# Altium PCB bottom.PcbDoc
Units mil, origin at the board's own origin, x right, y up, seen from the top; angles counter-clockwise.
Board outline 4222.01 x 2922.03 mil, 2 copper layers (Top Layer, Bottom Layer); 17 components, 14 nets, 128 pads, 40 vias.
Unrouted connection lines stored in the file: 21.
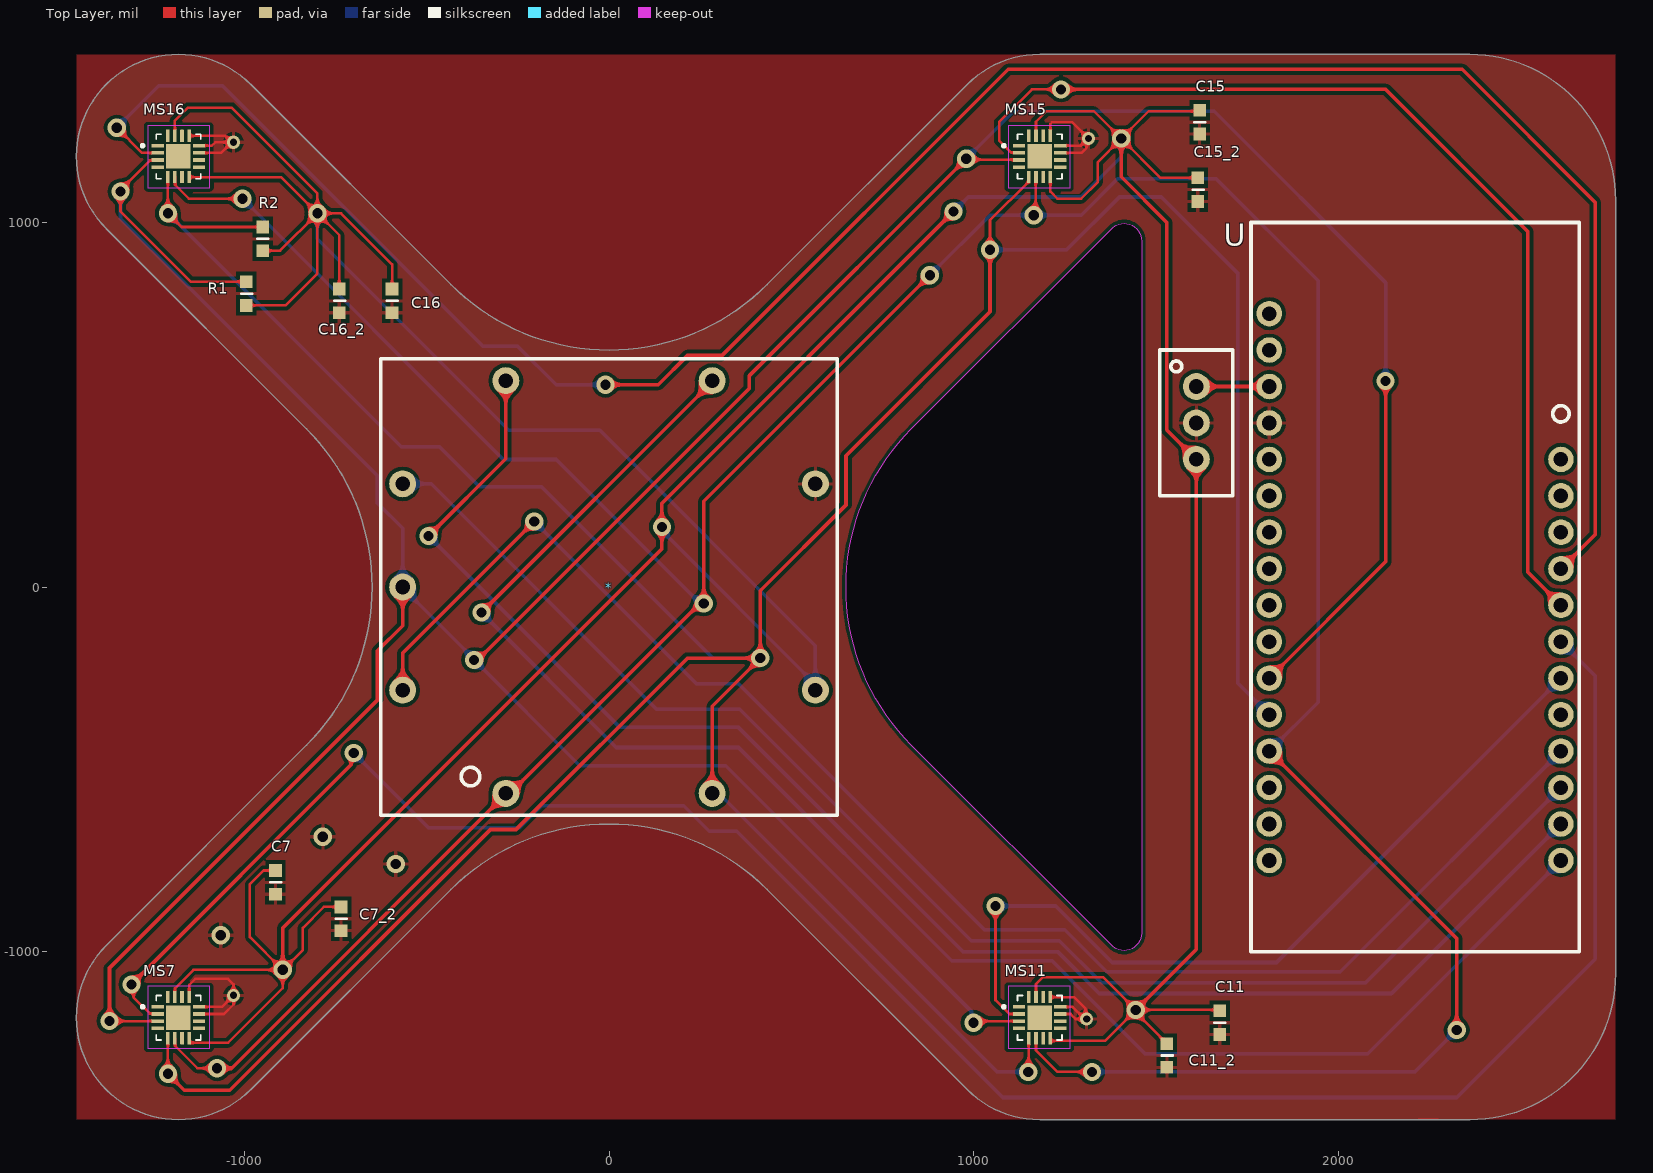
[diagram p0: Top Layer view]
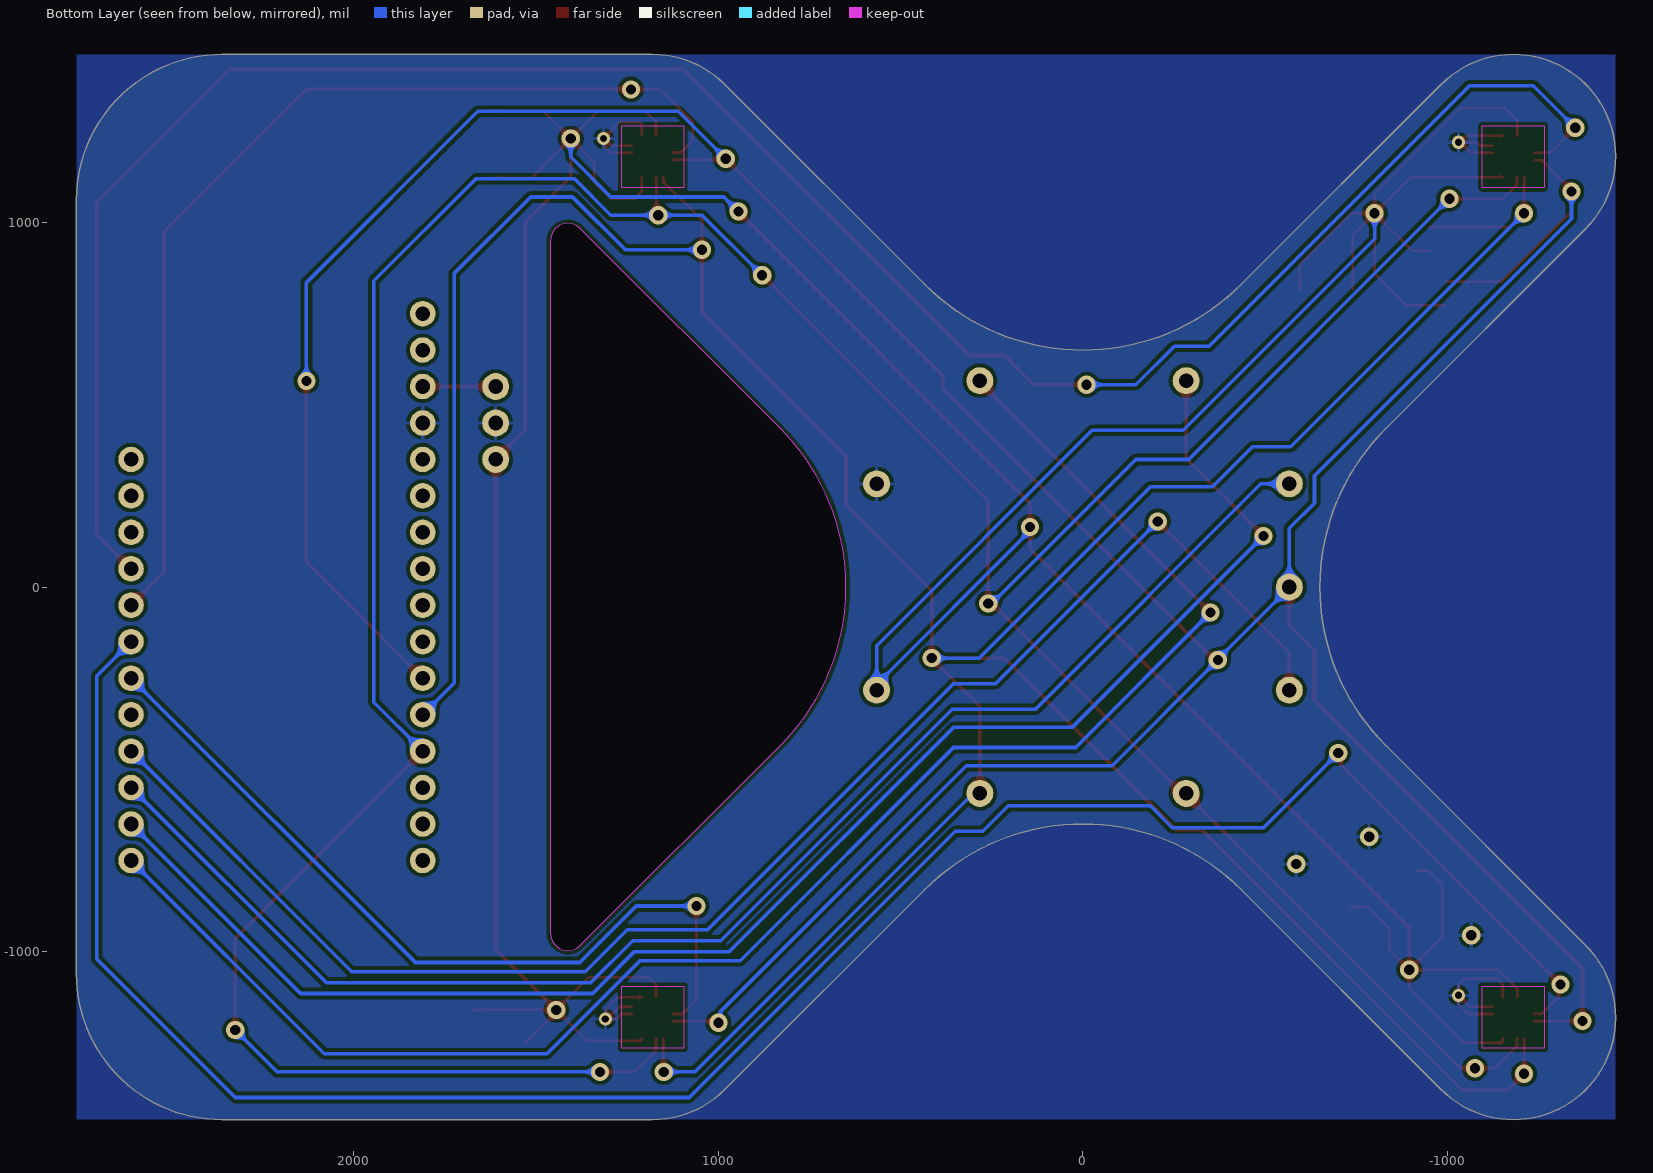
[diagram p1: Bottom Layer view, seen from below]
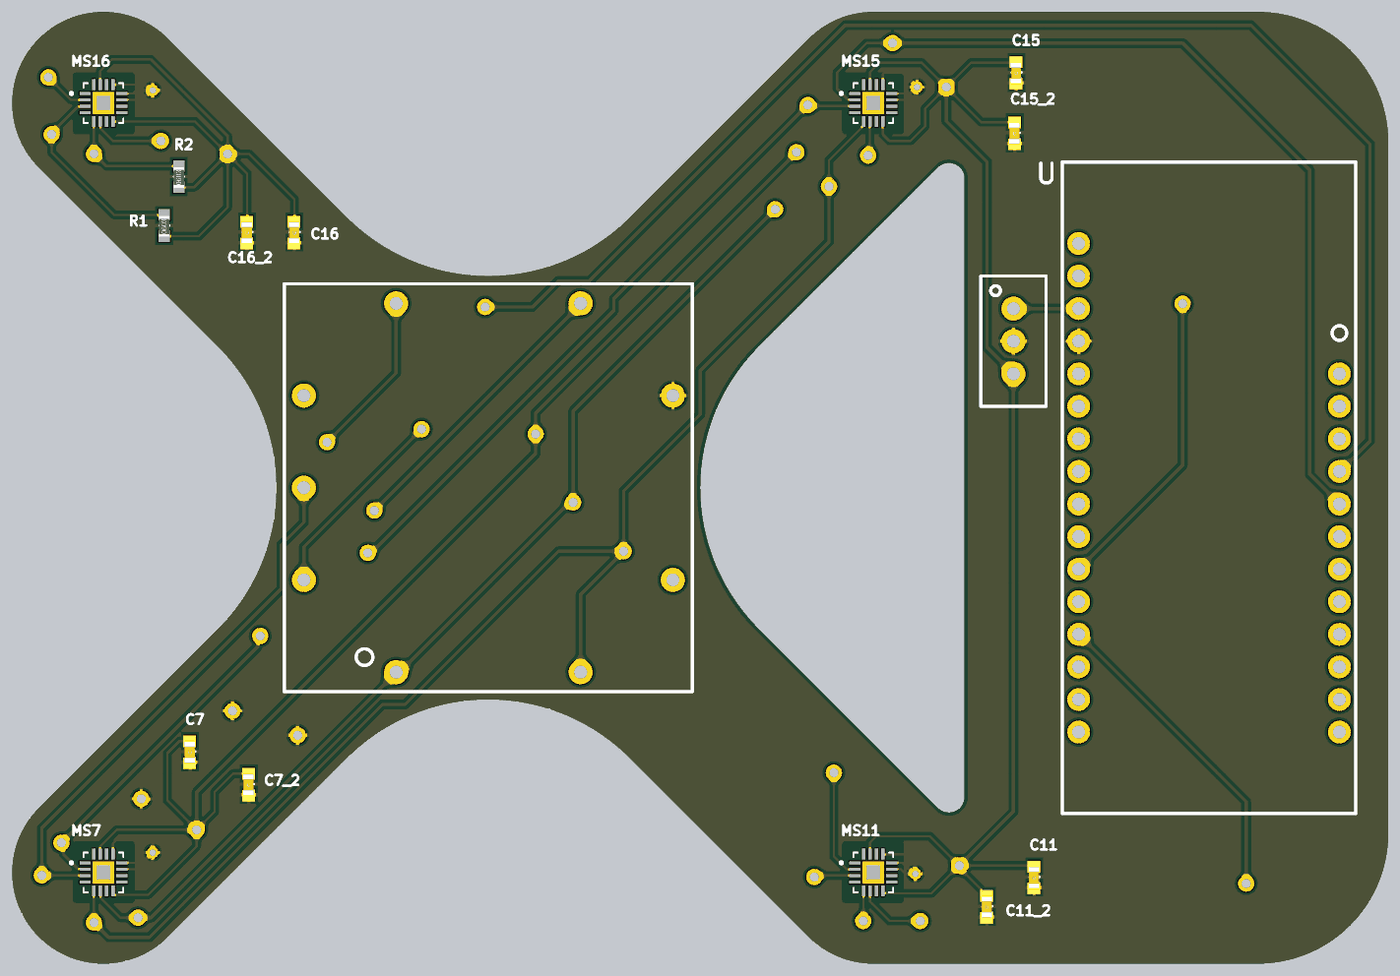
[diagram p2: 3D render of the assembled board from above, using the file's embedded part models]

## Layer stack, top to bottom
Top Solder: solder mask 0.4, Solder Resist, Dk 3.5
Top Layer: signal copper 1.4
Dielectric 1: dielectric 12.6, FR-4, Dk 4.8
Bottom Layer: signal copper 1.4
Bottom Solder: solder mask 0.4, Solder Resist, Dk 3.5

## Board outline
-983,-1379 cw(c-1181,-1181) -1379,-983 -829.61,-433.61 ccw(c-1263.21,0) -829.61,433.61 -1379,983 cw(c-1181,1181) -983,1379 -433.61,829.61 ccw(c0,1263.21) 433.61,829.61 983,1379 cw(c1181,1181) 1181,1461.01 2361,1461.01 cw(c2361,1061.01) 2761,1061.01 2761,-1061 cw(c2361,-1061) 2361,-1461 2360.99,-1461.01 1181,-1461.01 cw(c1181,-1181) 983,-1379 433.61,-829.61 ccw(c0,-1263.21) -433.61,-829.61
cut-out: 1379.06,-983.06 829.61,-433.61 cw(c1263.21,0) 829.61,433.61 829.61,433.91 1378.91,983.22 cw(c1412.88,949.12) 1461.01,949.12 1460.8,948.9 1460.8,-949.12 cw(c1412.88,-949.12)

## Design rules (kind name [scope] priority, off if disabled: settings)
Clearance [All] p1: gap=10 ignorepadtopadclearanceinfootprint=FALSE except(0: Arc-Hole Track-Hole SMDPad-Hole THPad-Hole Via-Hole Fill-Hole Poly-Hole Region-Hole Text-Hole)
PolygonConnect [All] p1: connectstyle=Relief reliefconductorwidth=10 reliefentries=4 polygonreliefangle="90 Angle" airgapwidth=10
RoutingVias [All] p1: holewidth=28 width=50 viastyle="Through Hole" minholewidth=28 minwidth=50 maxholewidth=28 maxwidth=50
SolderMaskExpansion [All] p1: expansion=4 istentingtop=FALSE
Width [All] p1: maxlimit=10 minlimit=7 preferedwidth=10 toplayer_maxwidth=7 toplayer_prefwidth=7 bottomlayer_minwidth=10 minimp=50.000000 maximp=50.000000 favimp=50.000000
30 further rules are at their usual default settings.

## Classes and differential pairs
component class MAGNETO: C7 C7_2 C11 C11_2 C15 C15_2 C16 C16_2 MS7 MS11 MS15 MS16 R1 R2

## Components (designator, comment, footprint, x,y, rotation, side; value= is the part's Value field where it differs from the comment)
* "PIN9_small" PIN9_small 0,0 r0 top
C7 "0.1uF" CAP_0603 -915,-810 r90 top
C7_2 "0.1uF" CAP_0603 -735,-910 r90 top
C11 "0.1uF" CAP_0603 1675,-1195 r90 top
C11_2 "0.1uF" CAP_0603 1530,-1285 r90 top
C15 "0.1uF" CAP_0603 1620,1275 r90 top
C15_2 "0.1uF" CAP_0603 1615,1090 r90 top
C16 "0.1uF" CAP_0603 -595,785 r90 top
C16_2 "0.1uF" CAP_0603 -740,785 r90 top
MS7 "MLX90393" MLX90393 -1181,-1181 r0 top
MS11 "MLX90393" MLX90393 1181,-1181 r0 top
MS15 "MLX90393" MLX90393 1181,1181 r0 top
MS16 "MLX90393" MLX90393 -1181,1181 r0 top
R1 "10k" RES_0603 -995,805 r90 top
R2 "10k" RES_0603 -950,955 r90 top
U "52832" feather 2211,0 r0 top
? "REGULATOR" "linear regulator" 1611,450 r0 top

## Footprints (in the part's own frame and the unit in brackets; to place one, negate y for a bottom-side part, rotate by r counter-clockwise, add the part's x,y. Pads: shape width x height; smd on the part's side, far side on the other; paste and mask are expansions set on the pad)
CAP_0603 [mil]
  rect 35x35 smd: 1(-32.5,0) 2(32.5,0)
  silkscreen extent 0,-16 0,14, body extent -53,-18 49,21, height 35
feather [mil]
  round 70 hole 40: 1(400,350) 2(400,250) 3(400,150) 4(400,50) 5(400,-50) 6(400,-150) 7(400,-250) 8(400,-350) 9(400,-450) 10(400,-550) 11(400,-650) 12(400,-750) 13(-400,750) 14(-400,650) 15(-400,550) 16(-400,450) 17(-400,350) 18(-400,250) 19(-400,150) 20(-400,50) 21(-400,-50) 22(-400,-150) 23(-400,-250) 24(-400,-350) 25(-400,-450) 26(-400,-550) 27(-400,-650) 28(-400,-750)
  silkscreen extent -450,-1000 450,1000
"linear regulator" [mil]
  round 74 hole 40: 1(0,100) 2(0,0) 3(0,-100)
  silkscreen extent -100,-200 100,200
MLX90393 [mm]
  rrect25% 0.86x0.26 smd: 1(-1.435,0.75) 2(-1.435,0.25) 3(-1.435,-0.25) 4(-1.435,-0.75) 9(1.435,-0.75) 10(1.435,-0.25) 11(1.435,0.25) 12(1.435,0.75)
  rrect25% 0.26x0.86 smd: 5(-0.75,-1.435) 6(-0.25,-1.435) 7(0.25,-1.435) 8(0.75,-1.435) 13(0.75,1.435) 14(0.25,1.435) 15(-0.25,1.435) 16(-0.75,1.435)
  rect 1.71x1.71 smd paste-2: 17(0,0)
  silkscreen extent -2.59,-1.55 1.55,1.55
PIN9_small [mil]
  round 74 hole 40: 1(-283,-566) 2(283,-566) 3(566,-283) 4(566,283) 5(283,566) 6(-283,566) 7(-566,283) 8(-566,0) 9(-566,-283)
  silkscreen extent -626,-626 626,626
RES_0603 [mil]
  rect 35x35 smd: 1(-32.5,0) 2(32.5,0)
  silkscreen extent 0,-16 0,14, body extent -34,-16 29,16, height 18

## Part data
C7 C7_2 C11 C11_2 C15 C15_2 C16 C16_2: library part CAP, "capacitance"
MS7 MS11 MS15 MS16: "sensor"
R1 R2: library part RES, "resistance"
U: library part Feather, "IC"
?: "linear regulator"

## Via types
v1: diameter 50, hole 28, Top Layer to Bottom Layer, 36 vias
v2: diameter 36, hole 20, Top Layer to Bottom Layer, 4 vias

## Nets (pads, with @x,y where several pads share a name; then routed paths per layer and width w, separated by ;. In a path a pad name is that pad's centre, name@x,y a point inside that pad or via, vN(x,y) a via of type N, cw(c..) or ccw(c..) an arc to the next point about the centre after c; other vN are vias at no path point)
GND: *.4 ?.2 C7.1 C7_2.1 C11.1 C11_2.1 C15.1 C15_2.1 C16.1 C16_2.1 MS7.11 MS7.12 MS7.13 MS11.11 MS11.12 MS11.13 MS15.11 MS15.12 MS15.13 MS16.11 MS16.12 MS16.13 U.16 | length 1407.1
  Top Layer w7: MS7.13 -1151.47,-1091.47 -1135,-1075 -1045,-1075 -1030,-1090 v2(-1030,-1120) ; MS16.13 -1052.81,1237.5 v2@-1035.31,1220 ; MS7.11 -1056.16,-1171.16 -1029.4,-1144.4 -1029.4,-1120.6 v2(-1030,-1120) ; MS7.12 -1061.47,-1151.47 v2(-1030,-1120) ; MS16.11 -1064.16,1190.84 v2@-1035,1220 ; MS16.12 -1089.47,1210.53 -1080,1220 v2@-1035.31,1220 ; v2(-1030,1220) v2@-1035,1220 ; MS11.13 1211.02,-1125 1275,-1125 1306.5,-1156.5 1306.5,-1181.5 v2(1310,-1185) v2@1305,-1185 ; MS15.13 1210.53,1270.53 1215,1275 1270,1275 v2(1315,1230) ; MS11.11 1266.16,-1171.16 1280,-1185 v2@1305,-1185 ; MS11.12 1271.47,-1151.47 v2@1305,-1185 ; MS15.11 1295.84,1190.84 1309.45,1204.45 1309.45,1224.45 v2(1315,1230) ; MS15.12 1294.17,1210.53 1313.64,1230 v2(1315,1230) ; v2@-1035.31,1220 v2@-1035,1220
  other v1: -1065,-955 -585,-760 -785,-685
Net*_1: *.1 MS7.6 MS11.6 MS15.6 MS16.6 U.25 | length 10111.4
  Top Layer w7: MS7.6 -1189.78,-1238.56 -1189.78,-1259.27 -1129.04,-1320 v1(-1075,-1320) ; MS16.6 -1189.78,1123.44 -1189.78,1102.73 -1152.04,1065 v1(-1005,1065) ; v1(1165,1020) 1170.09,1025.09 1170.09,1123.44 MS15.6 ; MS11.6 1171.16,-1271.16 1230,-1330 v1(1325,-1330)
  Top Layer w10: v1(-1075,-1320) -1035,-1320 -283,-568 *.1 -271.82,-566 249.18,-45 v1(260,-45) 260,235 v1(880,855) ; U.25 2325,-964 v1(2325,-1215)
  Bottom Layer w10: v1(-1005,1065) -290,350 -145,350 250,-45 v1(260,-45) ; v1(880,855) 1045,1020 v1(1165,1020) 1295,1020 1395,1120 1665,1120 1945,840 1945,-316 U.25 ; v1(1325,-1330) 2210,-1330 v1(2325,-1215)
Net*_2: *.2 MS7.5 MS11.5 MS15.5 MS16.5 R2.2 U.24 | length 10137.3
  Top Layer w7: MS7.5 -1210.26,-1237.76 -1210.26,-1334.74 v1(-1210,-1335) ; MS16.5 -1210.26,1124.24 -1210.26,1025.26 v1(-1210,1025) -1172.5,987.5 R2.2 ; v1(1045,925) 1045,1006.22 1151.47,1112.69 MS15.5 ; v1(1150,-1330) 1150.74,-1329.26 1150.74,-1238.23 MS11.5
  Top Layer w10: v1(-1210,-1335) -1165,-1380 -1040,-1380 -325,-665 -255,-665 215,-195 v1(415,-195) ; *.2 283,-327 v1(415,-195) ; v1(1045,925) 1045,755 650,360 650,225 415,-10 v1(415,-195)
  Bottom Layer w10: v1(-1210,1025) -570,385 -465,385 -355,275 -185,275 285,-195 v1(415,-195) ; *.2 300.32,-566 318.09,-583.77 318.77,-583.77 1065,-1330 v1(1150,-1330) ; v1(1045,925) 1255,925 1400,1070 1515,1070 1725,860 1725,-264 U.24
Net*_3: *.3 ?.3 C7.2 C7_2.2 C11.2 C11_2.2 C15.2 C15_2.2 C16.2 C16_2.2 MS7.8 MS7.15 MS11.8 MS11.15 MS15.8 MS15.15 MS16.8 MS16.15 R1.1 R2.1 | length 14223.7
  Top Layer w7: MS7.15 -1190.84,-1100.84 -1140,-1050 v1(-895,-1050) ; MS16.15 -1190.84,1279.16 -1155,1315 -1035,1315 -800,1080 v1(-800,1025) ; MS7.8 -1151.47,-1248.38 -1149.85,-1250 -1045,-1250 -895,-1100 v1(-895,-1050) ; MS16.8 -899.5,1124.5 v1(-800,1025) ; R1.1 -887.5,772.5 -800,860 v1(-800,1025) ; R2.1 -902.5,922.5 v1(-800,1025) ; C7.2 -947.5,-777.5 -985,-815 -985,-960 v1(-895,-1050) ; C16_2.2 -740,965 v1(-800,1025) ; C7_2.2 -782.5,-877.5 -840,-935 -840,-995 v1(-895,-1050) ; C16.2 -595,885 -735,1025 v1(-800,1025) ; MS11.15 1171.16,-1088.84 1190,-1070 1355,-1070 v1(1445,-1160) ; MS15.15 1171.16,1276.16 1200,1305 1330,1305 v1(1405,1230) ; MS11.8 1210.53,-1243.38 1212.15,-1245 1360,-1245 v1(1445,-1160) ; MS15.8 1210.53,1084.47 1230,1065 1295,1065 1340,1110 1340,1165 v1(1405,1230) ; C11_2.2 1445,-1167.5 v1(1445,-1160) ; C15_2.2 1512.5,1122.5 v1(1405,1230) ; C15.2 1617.5,1305 1480,1305 v1(1405,1230) ; C11.2 1672.5,-1160 v1(1445,-1160)
  Top Layer w10: v1(-895,-1050) -895,-935 145,105 v1(145,165) 145,230 v1(945,1030) ; v1(1405,1230) 1405,1125 1530,1000 1530,431 ?.3 1611,-994 v1(1445,-1160)
  Bottom Layer w10: v1(-800,1025) -800,955 -275,430 -25,430 566,-161 *.3@566,-266.82 ; v1(145,165) 145,154.18 *.3@566,-266.82 ; *.3 *.3@566,-266.82 ; v1(945,1030) 985,1070 1295,1070 1405,1180 v1(1405,1230)
Net*_5: *.5 U.12 | length 4579.9
  Top Layer w10: v1(-350,-70) 283,563 *.5
  Bottom Layer w10: v1(-350,-70) 20,-440 355,-440 940,-1025 1215,-1025 1470,-1280 2081,-1280 U.12
Net*_6: *.6 U.11 | length 4332.3
  Top Layer w10: v1(-495,140) -283,352 *.6
  Bottom Layer w10: v1(-495,140) 30,-385 355,-385 970,-1000 1230,-1000 1345,-1115 2146,-1115 U.11
Net*_7: *.7 U.10 | length 3965.2
  Bottom Layer w10: *.7 -488,283 130,-335 358.28,-335 993.28,-970 1235,-970 1350,-1085 2076,-1085 U.10
Net*_8: *.8 MS7.3 MS11.3 MS15.3 MS16.3 R1.2 U.23 | length 10588.3
  Top Layer w7: v1(-1370,-1190) -1369.58,-1190.42 -1237.92,-1190.42 MS7.3 ; MS16.3 -1238.56,1170.09 -1259.27,1170.09 -1340,1089.36 v1(-1340,1085) -1340,1030 -1147.5,837.5 R1.2 ; v1(980,1175) 982.78,1172.22 1123.44,1172.22 MS15.3 ; v1(1000,-1195) 1004.58,-1190.42 1124.08,-1190.42 MS11.3
  Top Layer w10: v1(-1370,-1190) -1370,-1045 -635,-310 -635,-175 -566,-106 *.8 ; v1(-370,-200) -360,-200 385,545 385,580 v1(980,1175) ; U.23 2130,69 v1(2130,565)
  Bottom Layer w10: v1(-1340,1085) -1340,1010 -635,305 -635,230 -566,161 *.8 -566,-2 -370,-198 v1(-370,-200) -80,-490 320,-490 994.22,-1164.22 994.22,-1189.22 v1(1000,-1195) ; v1(980,1175) 1110,1305 1660,1305 2130,835 v1(2130,565)
Net*_9: *.9 U.9 | length 4190.7
  Top Layer w10: *.9 -566,-181 v1(-205,180)
  Bottom Layer w10: v1(-205,180) 240,-265 355,-265 1030,-940 1250,-940 1365,-1055 2006,-1055 U.9
Net_1: ?.1 U.15 | length 200
  Top Layer w10: ?.1 U.15
NetMS7_2: MS7.2 U.6 | length 5923.5
  Top Layer w7: v1(-1310,-1090) -1303.86,-1096.14 -1303.86,-1125.5 -1259.27,-1170.09 -1238.56,-1170.09 MS7.2
  Top Layer w10: v1(-1310,-1090) -707.65,-487.65 -707.65,-462.65 v1(-700,-455)
  Bottom Layer w10: v1(-700,-455) -495,-660 -245,-660 -185,-600 205,-600 275,-670 350,-670 1080,-1400 2325,-1400 2705,-1020 2705,-244 U.6
NetMS11_2: MS11.2 U.7 | length 2285.5
  Top Layer w7: v1(1060,-875) 1060,-1132.9 1098.26,-1171.16 MS11.2
  Top Layer w10: U.7@2611,-259 U.7
  Bottom Layer w10: v1(1060,-875) 1225,-875 1380,-1030 1831,-1030 U.7
NetMS15_2: MS15.2 U.5 | length 2830.4
  Top Layer w7: MS15.2 1123.44,1191.91 1102.73,1191.91 1070,1224.64 1070,1275 1160,1365 v1(1240,1365)
  Top Layer w10: v1(1240,1365) 2130,1365 2520,975 2520,41 U.5
NetMS16_2: MS16.2 U.4 | length 6136.9
  Top Layer w7: v1(-1350,1260) -1280.84,1190.84 MS16.2
  Top Layer w10: v1(-10,555) 135,555 215,635 310,635 1095,1420 2340,1420 2705,1055 2705,144 U.4
  Bottom Layer w10: v1(-1350,1260) -1235,1375 -1060,1375 -345,660 -250,660 -145,555 v1(-10,555)
pads on no net: MS7.1 MS7.4 MS7.7 MS7.9 MS7.10 MS7.14 MS7.16 MS7.17 MS11.1 MS11.4 MS11.7 MS11.9 MS11.10 MS11.14 MS11.16 MS11.17 MS15.1 MS15.4 MS15.7 MS15.9 MS15.10 MS15.14 MS15.16 MS15.17 MS16.1 MS16.4 MS16.7 MS16.9 MS16.10 MS16.14 MS16.16 MS16.17 U.1 U.2 U.3 U.8 U.13 U.14 U.17 U.18 U.19 U.20 U.21 U.22 U.26 U.27 U.28

## Polygon pours and split planes (outlines as drawn)
GND on Top Layer "GND_L01_P004" (solid, remove dead copper, pour order 4): -1460,-1460 -1460,1460 2760,1460 2760,-1460
GND on Top Layer "GND_L01_P001" (solid, remove dead copper, pour order 1): 2275,-1460
GND on Top Layer "GND_L01_P000" (solid, remove dead copper, pour order 0): 2275,-1460 2220,-1460
GND on Bottom Layer "GND_L02_P005" (solid, remove dead copper, pour order 5): -1460,-1460 -1460,1460 2760,1460 2760,-1460

## Keep-outs
Top Layer:
  rectangle: 1095,1095 1265,1265
  rectangle: 1095,-1265 1265,-1095
  rectangle: -1265,-1265 -1095,-1095
  rectangle: -1265,1095 -1095,1265
Bottom Layer:
  rectangle: 1095,1095 1265,1265
  rectangle: 1095,-1265 1265,-1095
  rectangle: -1265,-1265 -1095,-1095
  rectangle: -1265,1095 -1095,1265

## Silkscreen, mask and mechanical layers (free items; w line width, h text height)
Mechanical 1:
  lines w10: 1460.8,948.9 1460.8,-949.12 cw(c1412.88,-949.12) 1379.06,-983.06 829.61,-433.61 cw(c1263.21,0) 829.61,433.61 829.61,433.91 1378.91,983.22 cw(c1412.88,949.12) 1461.01,949.12 ; -1379,-983 ccw(c-1181,-1181) -983,-1379 -433.61,-829.61 cw(c0,-1263.21) 433.61,-829.61 983,-1379 ccw(c1181,-1181) 1181,-1461.01 2360.99,-1461.01 ccw(c2361,-1061) 2761,-1061 2761,1061.01 ccw(c2361,1061.01) 2361,1461.01 1181,1461.01 ccw(c1181,1181) 983,1379 433.61,829.61 cw(c0,1263.21) -433.61,829.61 -983,1379 ccw(c-1181,1181) -1379,983 -829.61,433.61 cw(c-1263.21,0) -829.61,-433.61 -1379,-983